# EAGLE board Motor and Relay PCB (EAGLE 9.7.0)
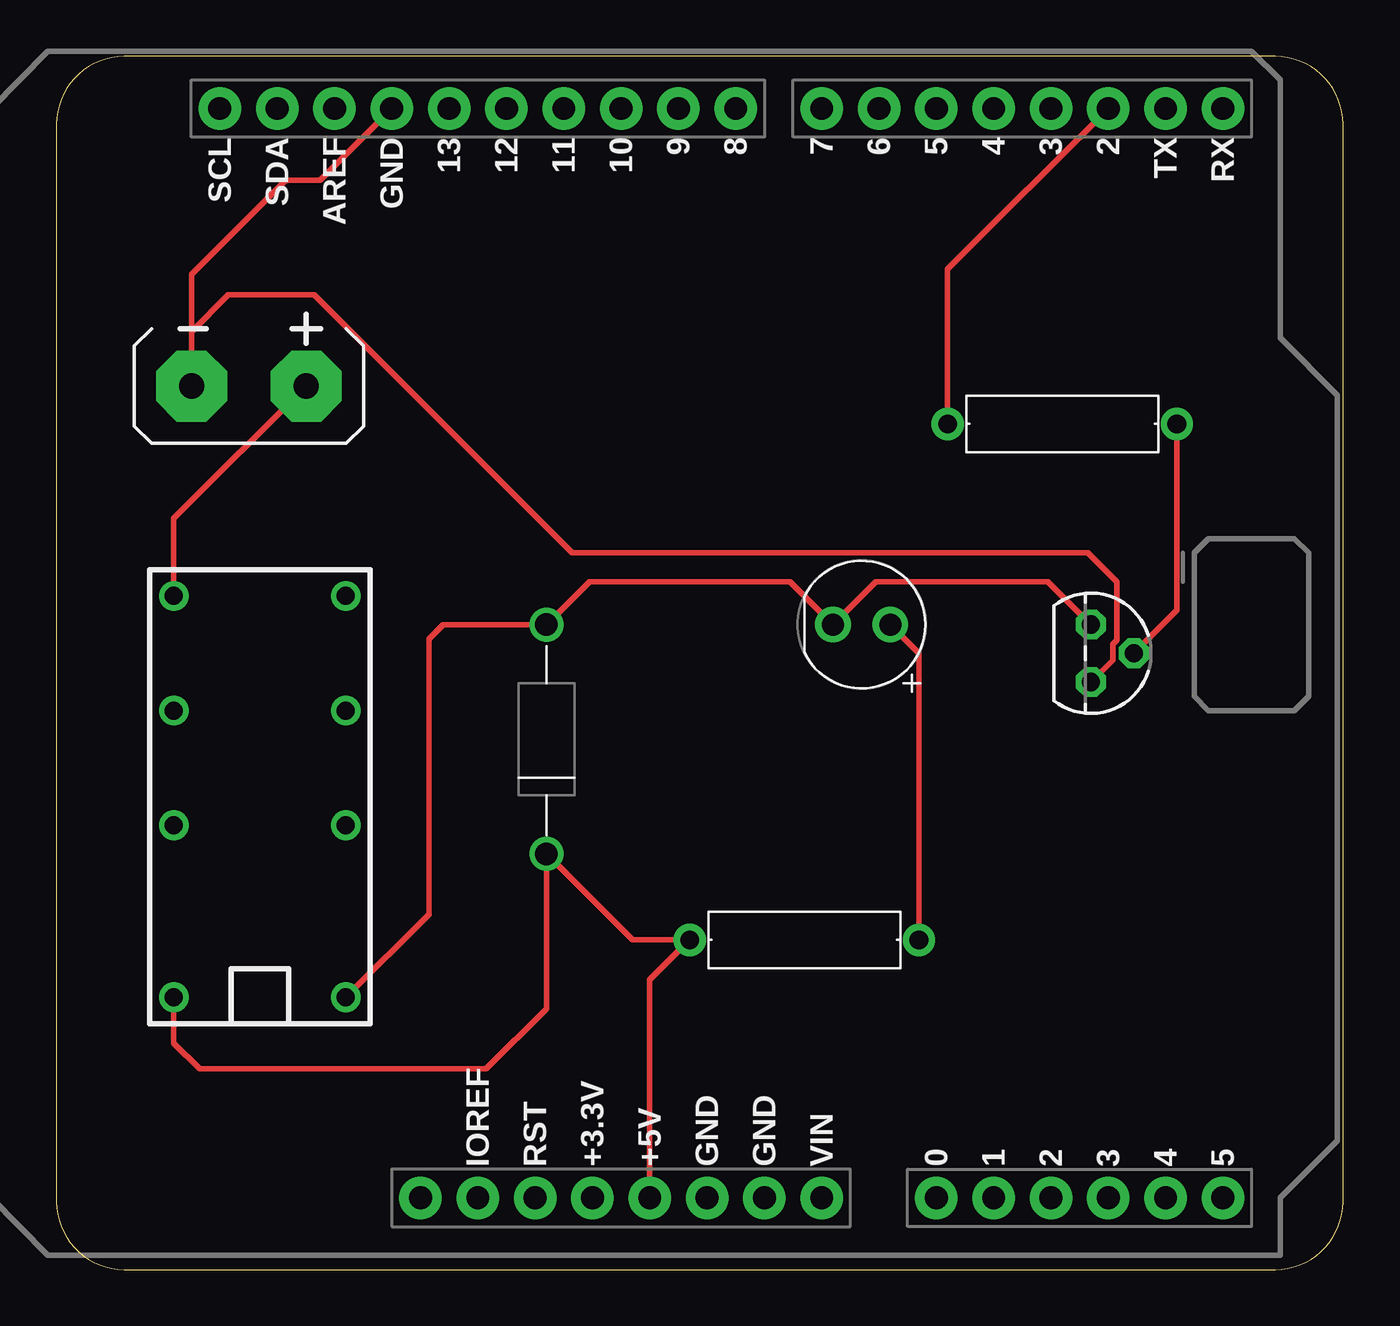
[diagram p0: board, top side]

Size 57.02 x 53.74 mm. Coordinates in mm from the lower left corner, seen from the top.
Outline: 54.02,0 arc90 57.02,3 57.02,50.74 arc90 54.02,53.74 3,53.74 arc90 0,50.74 0,3 arc90 3,0 54.02,0
Copper layers (1*16): Top 0.035mm / dielectric 1.5mm / Bottom 0.035mm
Design rules "default": minimum track width 6mil, minimum drill 0.35mm, track to track 6mil, track to pad 6mil, pad to pad 6mil, via to via 6mil, smd to smd 6mil, copper to edge 40mil, drill to drill 6mil, minimum pad ring 10mil, minimum via ring 8mil, stop-mask expansion 4mil, vias tented up to drill 0mil, thermal gap 10mil

## Footprints (pad centres in the part's own frame; a part is rotated, then mirrored left to right if it is on the bottom)
DIODE-AXIAL = drill 1: 1 -5.08,0; 2 5.08,0
LEDRD254W60D565H860B = drill 0.981 pad 1.581: 1 -1.27,0; 2 1.27,0
KS2E-M-DC5 = drill 0.8: 1 -8.89,-3.81; 4 -1.27,-3.81; 6 3.81,-3.81; 8 8.89,-3.81; 9 8.89,3.81; 11 3.81,3.81; 13 -1.27,3.81; 16 -8.89,3.81
MOTOR = drill 1.118 pad 3.15 octagon: + 2.54,0; - -2.54,0
RESAD1016W63L850D250B = drill 0.83 pad 1.43: 1 -5.08,0; 2 5.08,0
TO92 = drill 0.813 octagon: 1 -1.27,0; 2 0,1.905; 3 1.27,0
ARDUINO-UNO-R3-SHIELD = drill 1.016 pad 1.88: 3.3V 24.13,-2.54; 5V 24.13,0; A0 24.13,12.7; A1 24.13,15.24; A2 24.13,17.78; A3 24.13,20.32; A4 24.13,22.86; A5 24.13,25.4; AREF -24.13,-13.97; D2 -24.13,20.32; D3 -24.13,17.78; D4 -24.13,15.24; D5 -24.13,12.7; D6 -24.13,10.16; D7 -24.13,7.62; D8 -24.13,3.81; D9 -24.13,1.27; D10 -24.13,-1.27; D11 -24.13,-3.81; D12 -24.13,-6.35; D13 -24.13,-8.89; GND@0 24.13,2.54; GND@1 24.13,5.08; GND@2 -24.13,-11.43; IOREF 24.13,-7.62; NC 24.13,-10.16; RES 24.13,-5.08; RX -24.13,25.4; SCL -24.13,-19.05; SDA -24.13,-16.51; TX -24.13,22.86; VIN 24.13,7.62

## Placement (x,y rotation side)
D1  DIODEDIODE-AXIAL  [DIODE-AXIAL]  21.72,23.49 270 top
D2  RED  [LEDRD254W60D565H860B]  35.69,28.57 180 top
K1  RELAY-DPDT_KS2E  [KS2E-M-DC5]  9.02,20.95 90 top
M1  MOTOR_HDR  [MOTOR]  8.53,39.14 0 top
R1  1k  [RESAD1016W63L850D250B]  33.15,14.6 0 top
R2  1k  [RESAD1016W63L850D250B]  44.58,37.46 0 top
T1  NPN  [TO92]  45.85,27.3 270 top
U1  ARDUINO-UNO-R3-SHIELD  [ARDUINO-UNO-R3-SHIELD]  26.29,27.3 270 top

## Library data of the parts
D1 K1 M1 R1 R2 U1 = Tinkercad
D2 = Tinkercad; CATEGORY: Opto-Electronic; SUB-CATEGORY: LED; VALUE: LED_RED
T1 = Tinkercad; CATEGORY: Transistor; SUB-CATEGORY: BJT; TYPE: NPN

## Nets
D2_A: D2.1 R1.2
D2_C: D1.1 D2.2 K1.1 T1.1
M1_+: K1.9 M1.+
T1_B: R2.2 T1.2
U1_5V: D1.2 K1.16 R1.1 U1.5V
U1_D2: R2.1 U1.D2
U1_GND: M1.- T1.3 U1.GND@2

## Tracks (layer width: path | path; a pad name or v marks a point on that pad's centre or on a via)
D2_A
  Top 0.254: D2.1 38.23,27.3 R1.2
D2_C
  Top 0.254: K1.1 16.51,15.75 16.51,27.94 17.14,28.57 D1.1 23.63,30.48 32.51,30.48 D2.2 36.33,30.48 43.94,30.48 T1.1
M1_+
  Top 0.254: M1.+ 5.21,33.27 K1.9
T1_B
  Top 0.254: R2.2 49.66,29.21 T1.2
U1_5V
  Top 0.254: K1.16 5.21,10.03 6.35,8.89 19.05,8.89 21.72,11.56 D1.2 25.53,14.6 R1.1 26.29,12.83 U1.5V
U1_D2
  Top 0.254: R2.1 39.5,44.32 U1.D2
U1_GND
  Top 0.254: U1.GND@2 11.69,48.26 10.16,48.26 5.99,44.09 M1.- 5.99,41.55 7.62,43.18 11.43,43.18 22.86,31.75 45.72,31.75 46.99,30.48 46.99,27.87 46.81,27.69 46.81,27 T1.3